# Altium PCB power supply.PcbDoc
Units mil, origin at the board's own origin, x right, y up, seen from the top; angles counter-clockwise.
Board outline 4330.71 x 2362.2 mil, 2 copper layers (Top Layer, Bottom Layer); 17 components, 8 nets, 46 pads, 0 vias.
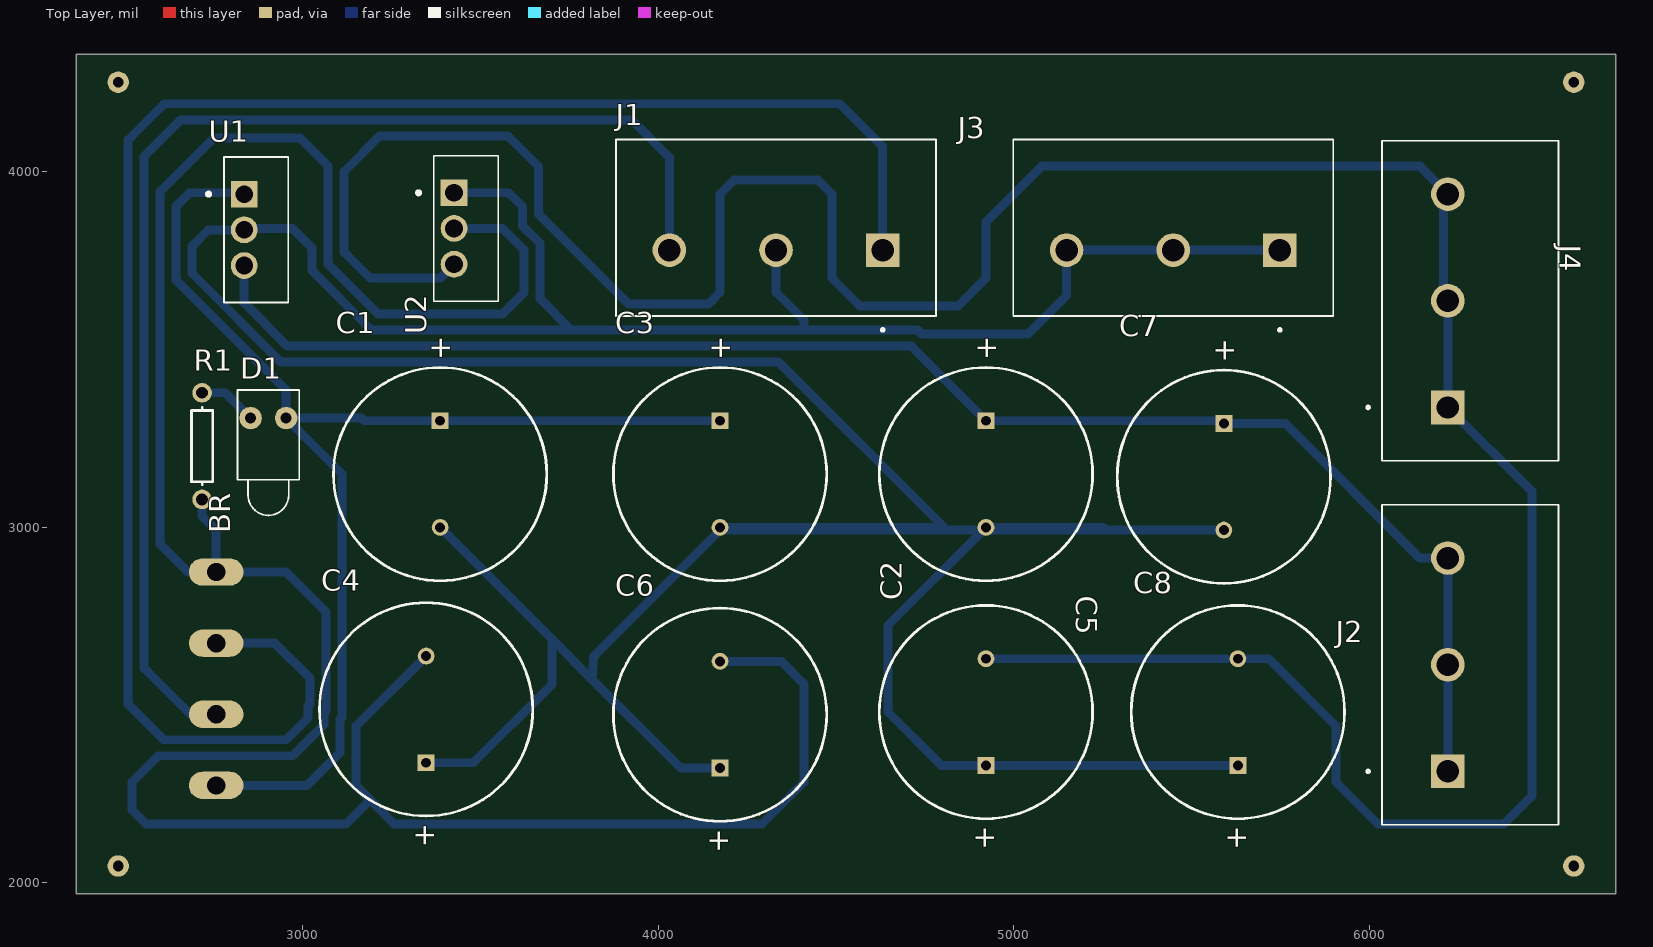
[diagram p0: Top Layer view]
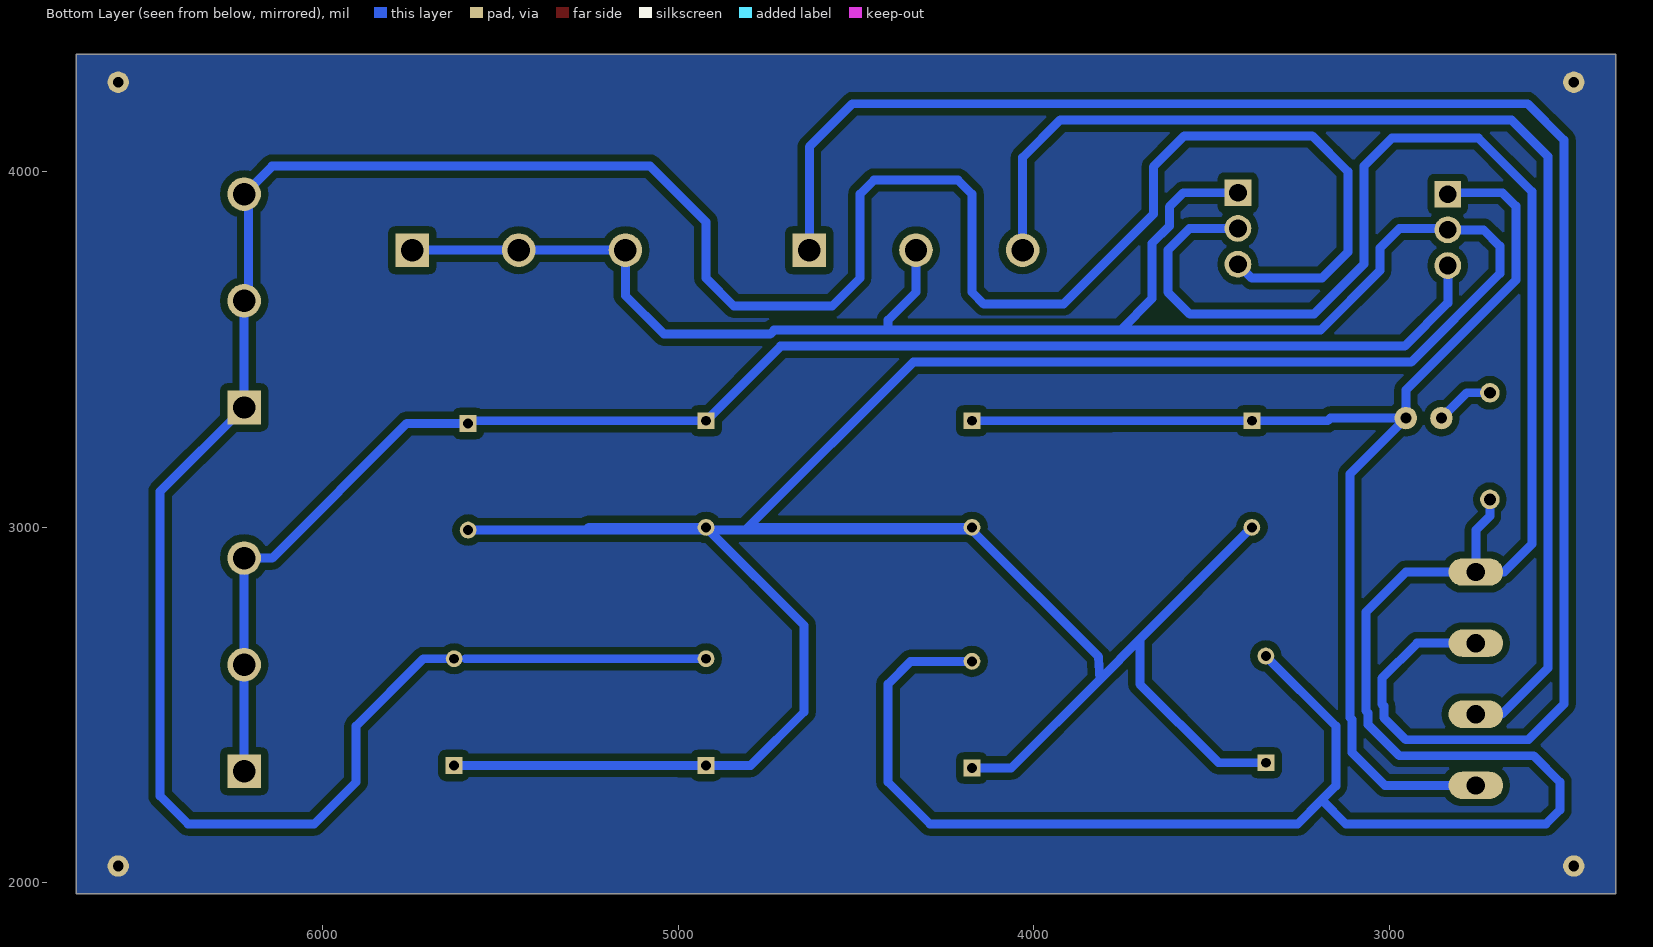
[diagram p1: Bottom Layer view, seen from below]

## Layer stack, top to bottom
Top Solder: solder mask 0.4, Solder Resist, Dk 3.5
Top Layer: signal copper 1.4
Dielectric 1: dielectric 12.6, FR-4, Dk 4.8
Bottom Layer: signal copper 1.4
Bottom Solder: solder mask 0.4, Solder Resist, Dk 3.5

## Board outline
2362.2,4330.71 6692.91,4330.71 6692.91,1968.5 2362.2,1968.5

## Design rules (kind name [scope] priority, off if disabled: settings)
Clearance [All] p1: gap=20 ignorepadtopadclearanceinfootprint=FALSE except(0: Arc-Hole Track-Hole SMDPad-Hole THPad-Hole Via-Hole Fill-Hole Poly-Hole Region-Hole Text-Hole)
PolygonConnect [All] p1: connectstyle=Relief reliefconductorwidth=10 reliefentries=4 polygonreliefangle="90 Angle" airgapwidth=10
RoutingLayers [All] p1: top layer_v5=FALSE bottom layer_v5=TRUE
RoutingVias [All] p1: holewidth=28 width=50 viastyle="Through Hole" minholewidth=28 minwidth=50 maxholewidth=28 maxwidth=50
SolderMaskExpansion [All] p1: expansion=4 istentingtop=FALSE
Width [All] p1: maxlimit=30 minlimit=10 preferedwidth=25 toplayer_maxwidth=10 toplayer_prefwidth=10 bottomlayer_minwidth=20 minimp=50.000000 maximp=50.000000 favimp=50.000000
29 further rules are at their usual default settings.

## Components (designator, comment, footprint, x,y, rotation, side; value= is the part's Value field where it differs from the comment)
BR "KBL04-E4/51" DIOB_KBL04-E4/51 2795.37,2573.97 r90 top
C1 "Cap Pol1" RB7.6-15 3385.83,3149.61 r90 top value=2200uF
C2 "Cap Pol1" RB7.6-15 4921.26,3149.61 r90 top value=100uF
C3 "Cap Pol1" RB7.6-15 4173.23,3149.61 r90 top value=0.1uF
C4 "Cap Pol1" RB7.6-15 3346.46,2487.79 r270 top value=2200uF
C5 "Cap Pol1" RB7.6-15 4921.26,2480.32 r270 top value=100uF
C6 "Cap Pol1" RB7.6-15 4173.23,2472.84 r270 top value=0.1uF
C7 "Cap Pol1" RB7.6-15 5590.55,3142.13 r90 top value=0.1uF
C8 "Cap Pol1" RB7.6-15 5629.92,2480.32 r270 top value=0.1uF
D1 "LED1" LED-1 2902.76,3307.09 r270 top
J1 "Power" CUI_TB005-762-03BE 4630.71,3779.53 r180 top
J2 "+VCC" CUI_TB005-762-03BE 6220.47,2313.38 r90 top
J3 "Ground" CUI_TB005-762-03BE 5748.03,3779.53 r180 top
J4 "-VCC" CUI_TB005-762-03BE 6220.47,3337.01 r90 top
R1 "Res1" AXIAL-0.3 2716.54,3228.35 r90 top value=1K
U1 "L7815CV" TO255P1040X460X1935-3 2834.65,3937.01 r270 top
U2 "L7915CV" TO255P1040X460X1935-3 3425.2,3940.94 r270 top

## Footprints (in the part's own frame and the unit in brackets; to place one, negate y for a bottom-side part, rotate by r counter-clockwise, add the part's x,y. Pads: shape width x height; smd on the part's side, far side on the other; paste and mask are expansions set on the pad)
AXIAL-0.3 [mm] "Axial Device, Thru-Hole; 2 Leads; 0.3 in Pin Spacing"
  round 1.4 hole 0.85: 1(-3.81,0) 2(3.81,0)
  silkscreen extent -2.77,-0.76 2.77,0.76
CUI_TB005-762-03BE [mm]
  rect 2.4x2.4 hole 1.6: 1(0,0)
  round 2.4 hole 1.6: 2(7.62,0) 3(15.24,0)
  silkscreen extent -3.81,-7.9 19.05,5.8
DIOB_KBL04-E4/51 [mm]
  oval 1.95x3.9 hole 1.3: NEG(7.621,1.002) POS(-7.619,1.002) ~(-2.539,1.002) ~.(2.541,1.002)
LED-1 [mm] "LED; 2 Leads"
  round 1.6 hole 0.8: 1(0,1.27) 2(0,-1.27)
  silkscreen extent -2,-2.2 6.95,2.2
RB7.6-15 [mm] "Polarized Capacitor (Radial); 2 Leads"
  rect 1.2x1.2 hole 0.7: 1(3.81,0)
  round 1.2 hole 0.7: 2(-3.81,0)
  silkscreen extent -7.62,-7.62 7.62,7.62
TO255P1040X460X1935-3 [mm]
  rect 1.91x1.91 hole 1.27: 1(0,0)
  round 1.91 hole 1.27: 2(2.55,0) 3(5.1,0)
  silkscreen extent -2.65,-2.64 7.75,3.15

## Part data
BR: "Bridge Rectifier Single Phase Standard 400V Through Hole KBL", Package="SIP-4 Diodes Inc.", Availability=Unavailable, MF="Diodes Inc.", Mouser-Purchase-URL=https://snapeda.com/shop?store=Mouser&id=130069, MP=GBJ1508-F, Price=None, SnapEDA_Link=https://www.snapeda.com/parts/GBJ1508-F/Diodes%20Inc./view-part/130069/?ref=snap
C1 C2 C3 C4 C5 C6 C7 C8: "Polarized Capacitor (Radial)", LatestRevisionDate=17-Jul-2002, LatestRevisionNote="Re-released for DXP Platform.", PackageDescription="Polarized Capacitor (Radial); 2 Leads", PackageReference=RB7.6-15, Published=8-Jun-2000, Publisher="Altium Limited"
D1: "Typical RED GaAs LED", LatestRevisionDate=08-Jul-2005, LatestRevisionNote="Mech Layer 1 removed.", PackageDescription="LED; 2 Leads", PackageReference=LED-1, Published=8-Jun-2000, Publisher="Altium Limited"
J1 J2 J3 J4: library part TB005-762-03BE, "2~24 Poles, Screw Type, Horizontal, 7.62 Pitch, 26~10 _AWG_, Terminal Block Connector", Package=None, Availability=Unavailable, CUI_purchase_URL=https://www.cuidevices.com/product/interconnect/connectors/terminal-blocks/tb005-762-series?utm_source=snapeda.com&utm_medium=referral&utm_campaign=snapedaBOM, MF="CUI Devices", MP=TB005-762-03BE, Price=None, SnapEDA_Link=https://www.snapeda.com/parts/TB005-762-03BE/CUI%20Devices/view-part/3590987/?ref=snap
R1: "Resistor", LatestRevisionDate=17-Jul-2002, LatestRevisionNote="Re-released for DXP Platform.", PackageDescription="Axial Device, Thru-Hole; 2 Leads; 0.3 in Pin Spacing", PackageReference=AXIAL-0.3, Published=8-Jun-2000, Publisher="Altium Limited"
U1 U2: "Linear Voltage Regulator IC 1 Output 1.5A TO-220AB", Package="TO-220 STMicroelectronics", Availability=Unavailable, MF=STMicroelectronics, Price=None
  U1: MP=L7815CV, SnapEDA_Link=https://www.snapeda.com/parts/L7815CV/STMicroelectronics/view-part/4730/?ref=snap
  U2: MP=L7915CV, SnapEDA_Link=https://www.snapeda.com/parts/L7915CV/STMicroelectronics/view-part/8087/?ref=snap

## Free pads (board coordinates)
  round 60 hole 30: 14(2480.32,4251.97) 15(6574.8,4251.97) 16(6574.8,2047.24) 17(2480.32,2047.24)

## Nets (pads, with @x,y where several pads share a name; then routed paths per layer and width w, separated by ;. In a path a pad name is that pad's centre, name@x,y a point inside that pad or via, vN(x,y) a via of type N, cw(c..) or ccw(c..) an arc to the next point about the centre after c; other vN are vias at no path point)
NetBR_NEG: BR.NEG C4.2 C6.2 R1.1 U2.2 | length 7632.4
  Bottom Layer w25: R1.1 2716.54,3031.5 2755.91,2992.13 BR.NEG ; C4.2 3149.61,2440.95 3149.61,2272.44 3188.98,2233.07 ; U2.2 3561.02,3840.55 3622.05,3779.53 3622.05,3661.42 3560.2,3599.57 3211.46,3599.57 3070.87,3740.16 3070.87,4015.75 2992.13,4094.49 2748.39,4094.49 2598.43,3944.53 2598.43,2952.76 2677.17,2874.02 BR.NEG ; C6.2 4345.67,2622.83 4409.45,2559.06 4409.45,2283.46 4291.34,2165.35 3256.69,2165.35 3188.98,2233.07 ; BR.NEG 2952.76,2874.02 3065.24,2761.54 3065.24,2483.86 3059.61,2478.23 3059.61,2445.71 2971.26,2357.36 2593.58,2357.36 2519.68,2283.46 2519.68,2204.72 2559.06,2165.35 3121.26,2165.35 3188.98,2233.07
NetBR_POS: BR.POS C1.1 C3.1 D1.1 U1.1 | length 3549.7
  Bottom Layer w25: BR.POS 3011.91,2274.02 3104.61,2366.71 3104.61,2459.59 3110.24,2465.22 3110.24,3149.61 D1.1 ; U1.1@2834.65,3940.95 2681.1,3940.95 2643.43,3903.27 2643.43,3695.16 2952.76,3385.83 D1.1 ; C3.1 3779.26,3299.61 C1.1 3172.74,3299.6 3165.26,3307.09 D1.1
NetBR_~: BR.~ J1.3 | length 3520.2
  Bottom Layer w25: BR.~ 2683.26,2474.02 2553.43,2603.85 2553.43,4043.57 2655.91,4146.05 3924.82,4146.05 4030.71,4040.16 J1.3
NetBR_~.: BR.~. J1.1 | length 5084.3
  Bottom Layer w25: BR.~. 2921.26,2674.02 3020.24,2575.04 3020.24,2502.5 3014.61,2496.87 3014.61,2464.35 2952.62,2402.36 2608.26,2402.36 2508.26,2502.36 2508.26,4089.36 2610.26,4191.36 4509.43,4191.36 4630.71,4070.08 J1.1
NetC1_2: C1.2 C2.2 C3.2 C4.1 C5.1 C6.1 C7.2 C8.1 J1.2 J3.1 J3.2 J3.3 U1.2 U2.1 | length 13040.6
  Bottom Layer w25: U1.2 U1.2@2830.71,3836.62 ; C4.1 3479.53,2337.8 3700.79,2559.06 3700.79,2684.64 ; C1.2 3700.79,2684.64 ; U2.1 3578.74,3940.95 3618.11,3901.58 3618.11,3847.11 3667.05,3798.17 3667.05,3642.78 3755.26,3554.57 ; C6.1 4062.6,2322.83 3813.81,2571.62 ; C3.2 4803.15,2999.61 4338.19,3464.57 2937.66,3464.57 2688.43,3713.8 2688.43,3790.79 2734.25,3836.62 U1.2@2830.71,3836.62 ; J1.2 4330.71,3661.42 4409.45,3582.68 4409.45,3554.57 ; C2.2 5251.26,2999.61 5258.74,2992.13 ; C7.2 5258.74,2992.13 ; C8.1 5629.87,2330.36 5001.26,2330.36 5001.21,2330.31 C5.1 4795.67,2330.31 4645.67,2480.32 4645.67,2724.02 C2.2@4913.78,2992.13 ; J3.1 5747.2,3780.36 5448.87,3780.36 J3.2 J3.3 5148.03,3651.97 5039.37,3543.31 4741.2,3543.31 4729.94,3554.57 4409.45,3554.57 ; U1.2@2830.71,3836.62 2834.65,3840.55 2970.47,3840.55 3025.87,3785.16 3025.87,3721.52 3192.82,3554.57 3755.26,3554.57 ; 3700.79,2684.64 3813.81,2571.62 ; 3755.26,3554.57 4409.45,3554.57 ; 3813.81,2571.62 3816.9,2635.8 4173.23,2992.13 C2.2@4913.78,2992.13 ; C2.2@4913.78,2992.13 5258.74,2992.13
NetC2_1: C2.1 C7.1 J2.1 J2.2 J2.3 U1.3 | length 4392.1
  Bottom Layer w25: U1.3@2834.65,3740.16 2834.65,3631.22 2956.3,3509.57 4711.3,3509.57 C2.1 5583.07,3299.61 C7.1 5762.99,3292.13 6141.73,2913.39 J2.3 J2.2 J2.1
NetC5_2: C5.2 C8.2 J4.1 J4.2 J4.3 U2.3 | length 8504.3
  Bottom Layer w25: U2.3 3385.83,3700.79 3188.98,3700.79 3115.87,3773.9 3115.87,4000.7 3216.21,4101.05 3576.12,4101.05 3663.11,4014.06 3663.11,3880.85 3916.28,3627.68 4139.49,3627.68 4173.23,3661.42 4173.23,3937.01 4212.6,3976.38 4448.82,3976.38 4488.19,3937.01 4488.19,3700.79 4566.93,3622.05 4842.52,3622.05 4921.26,3700.79 4921.26,3858.27 5078.74,4015.75 6141.73,4015.75 J4.3 6207.76,3924.3 6207.76,3649.72 J4.2 J4.1 6456.69,3100.79 6456.69,2244.1 6377.95,2165.35 6023.62,2165.35 5905.51,2283.46 5905.51,2440.94 5716.14,2630.31 C8.2 ; C5.2 5598.03,2630.31
NetD1_2: D1.2 R1.2 | length 165.7
  Bottom Layer w25: R1.2 2781.5,3378.35 D1.2

## Polygon pours and split planes (outlines as drawn)
no net on Bottom Layer "Bottom Layer-No Net" (solid, pour order 2): 2362.2,4330.71 6692.91,4330.71 6692.91,1968.5 2362.2,1968.5

## Silkscreen, mask and mechanical layers (free items; w line width, h text height)
board outline:
  the board outline again, w39.37

## Text inside footprints (layer, text, board x,y; h text height)
C1: Top Overlay "+" at 3414.83,3469.76 h59.06 r90
C2: Top Overlay "+" at 4950.27,3469.76 h59.06 r90
C3: Top Overlay "+" at 4202.24,3469.76 h59.06 r90
C4: Top Overlay "+" at 3317.45,2167.64 h59.06 r270
C5: Top Overlay "+" at 4892.25,2160.16 h59.06 r270
C6: Top Overlay "+" at 4144.22,2152.68 h59.06 r270
C7: Top Overlay "+" at 5619.56,3462.28 h59.06 r90
C8: Top Overlay "+" at 5600.91,2160.16 h59.06 r270